# Altium PCB Airbrake Motor Controller.PcbDoc (part 1 of 2)
Units mil, origin at the board's own origin, x right, y up, seen from the top; angles counter-clockwise.
Board outline 2250 x 2250 mil, 4 copper layers (Top Layer, Power Plane, Ground Plane, Bottom Layer), stack 23.756 mil thick; 112 components, 86 nets, 376 pads, 168 vias.
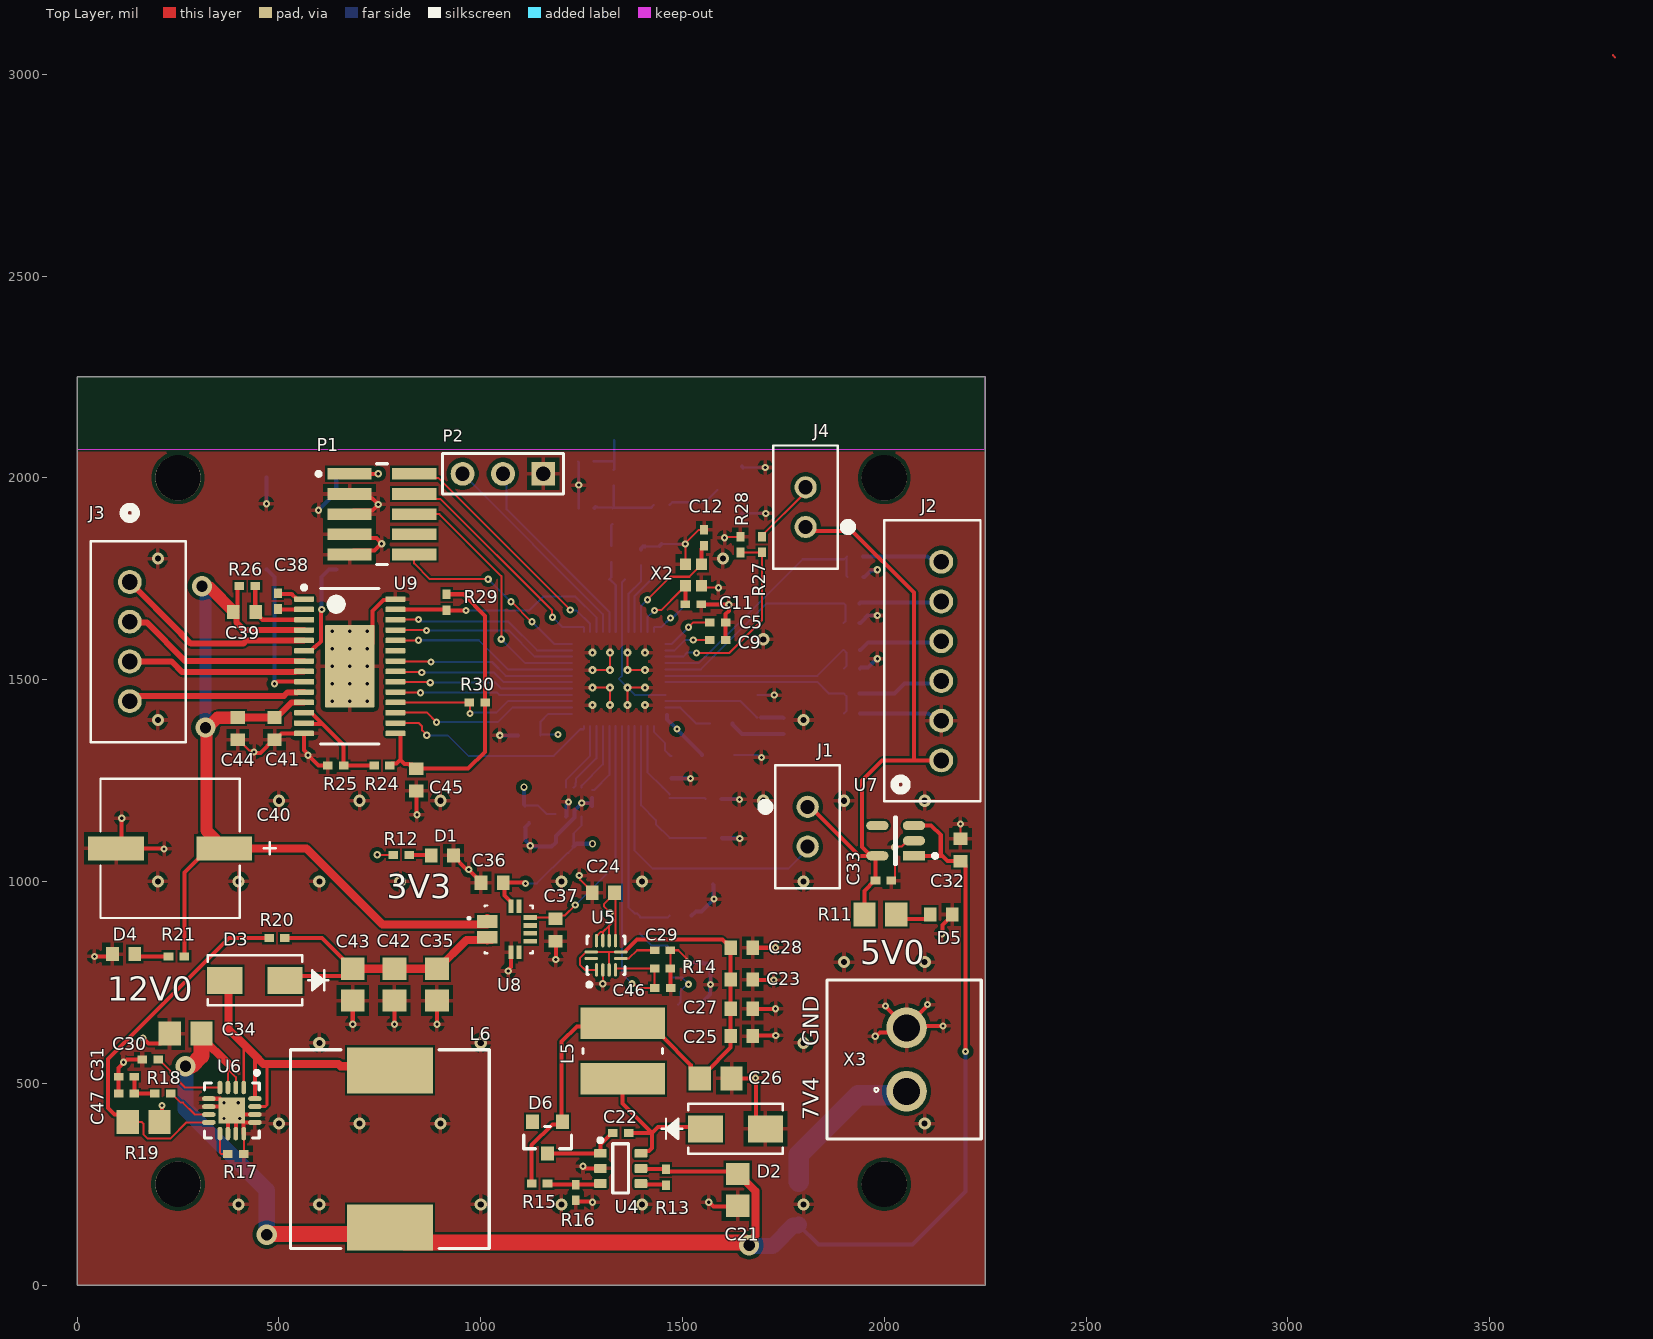
[diagram p0: Top Layer view]
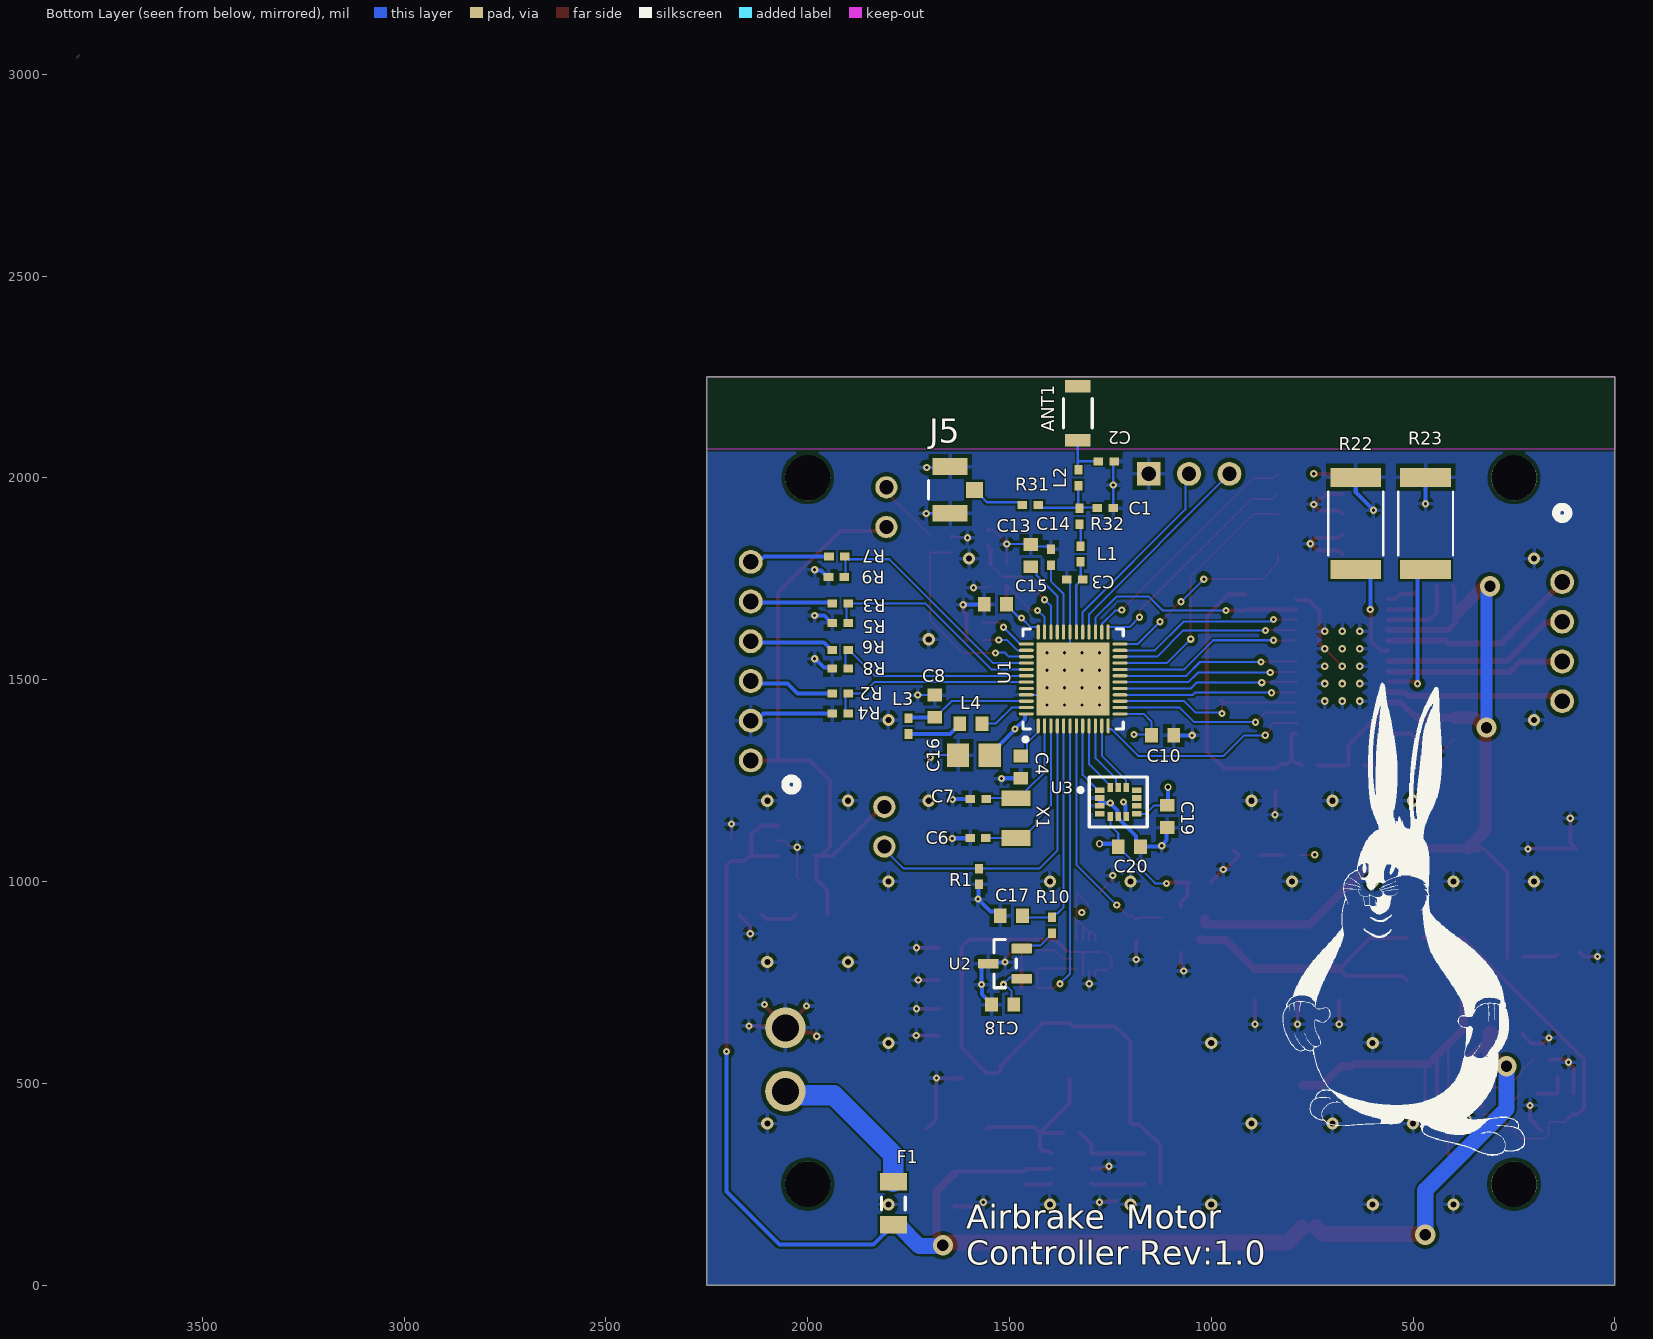
[diagram p1: Bottom Layer view, seen from below]
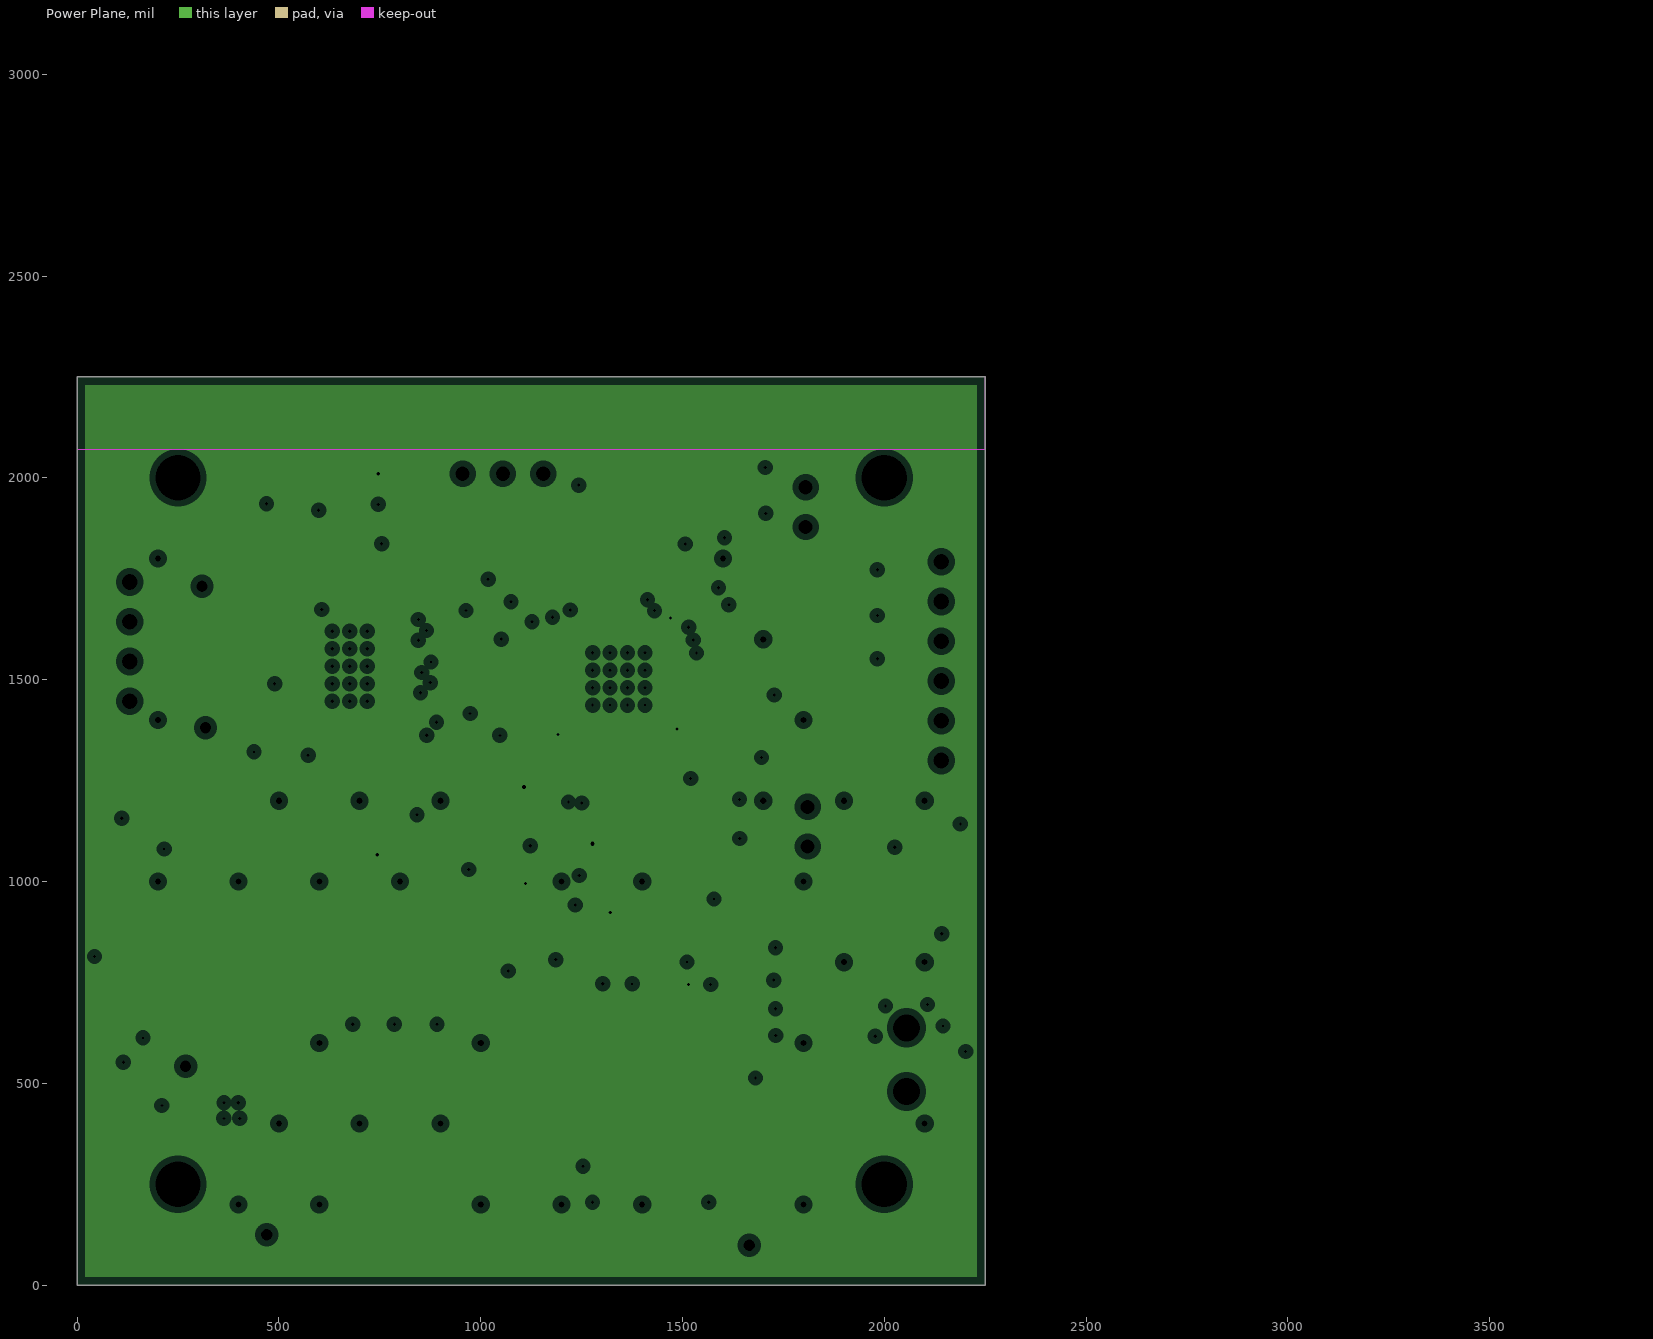
[diagram p2: Power Plane, clearances drawn from the general rule]
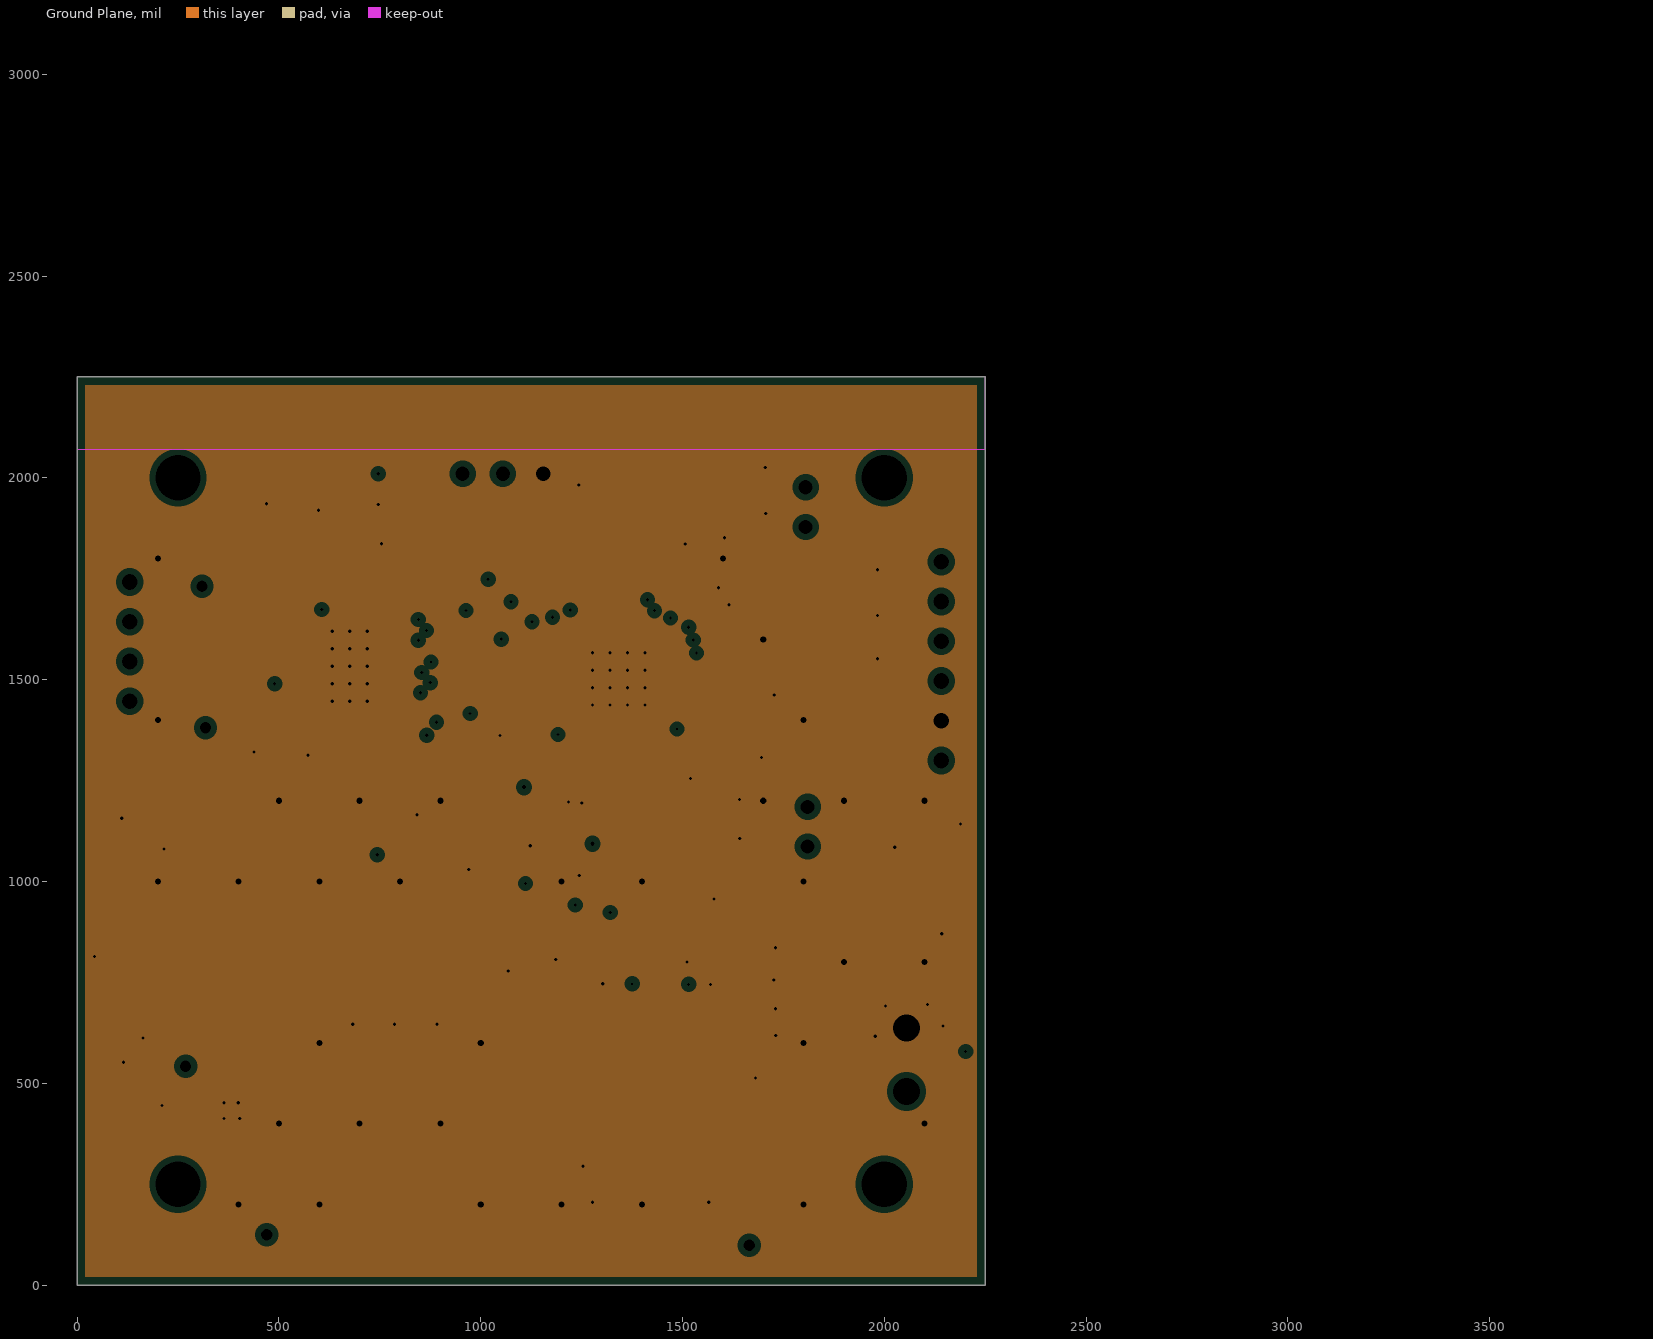
[diagram p3: Ground Plane, clearances drawn from the general rule]

## Layer stack, top to bottom
Top Solder: solder mask 0.4, Solder Resist, Dk 3.5
Top Layer: signal copper 1.4
Dielectric 2: prepreg 2.8, PP-006, Dk 4.1
Power Plane: plane copper 1.378, net 3V3
Dielectric 1: dielectric 12.6, FR-4, Dk 4.8
Ground Plane: plane copper 1.378, net GND
Dielectric 3: prepreg 2.8, PP-006, Dk 4.1
Bottom Layer: signal copper 1.4
Bottom Solder: solder mask 0.4, Solder Resist, Dk 3.5

## Board outline
0,0 2250,0 2250,2250 0,2250

## Design rules (kind name [scope] priority, off if disabled: settings)
Clearance "Stitching GND" [IsStitchingVia and InNet('GND') vs (IsVia and (Not IsStitchingVia)) Or IsPad] p1: gap=5 ignorepadtopadclearanceinfootprint=FALSE
Clearance [All] p2: gap=5 ignorepadtopadclearanceinfootprint=FALSE except(0: Arc-Text Arc-Hole Track-Text Track-Hole SMDPad-Hole THPad-Hole Via-Text Via-Hole Fill-Text Fill-Hole Poly-Text Poly-Hole Region-Text Region-Hole Text-Hole; 6: SMDPad-Text THPad-Text Text-Text; 10: Arc-Via Track-Via SMDPad-Via THPad-Via THPad-Fill THPad-Poly THPad-Region Via-Via Via-Fill Via-Poly Via-Region)
DiffPairsRouting [All] p1: maxlimit=10 minlimit=10 mostfreqgap=10 substack1={1D8CD49F-4EEA-4594-B777-3CBCF2328C12} toplayer_{1d8cd49f-4eea-4594-b777-3cbcf2328c12}_minwidth=15 toplayer_{1d8cd49f-4eea-4594-b777-3cbcf2328c12}_maxwidth=15 toplayer_{1d8cd49f-4eea-4594-b777-3cbcf2328c12}_prefwidth=15 bottomlayer_{1d8cd49f-4eea-4594-b777-3cbcf2328c12}_minwidth=15 bottomlayer_{1d8cd49f-4eea-4594-b777-3cbcf2328c12}_maxwidth=15 bottomlayer_{1d8cd49f-4eea-4594-b777-3cbcf2328c12}_prefwidth=15 substack2={60200B00-BAF0-4EC6-BC13-ED241C6110E6} toplayer_{60200b00-baf0-4ec6-bc13-ed241c6110e6}_minwidth=15 toplayer_{60200b00-baf0-4ec6-bc13-ed241c6110e6}_maxwidth=15 toplayer_{60200b00-baf0-4ec6-bc13-ed241c6110e6}_prefwidth=15 bottomlayer_{60200b00-baf0-4ec6-bc13-ed241c6110e6}_minwidth=15 bottomlayer_{60200b00-baf0-4ec6-bc13-ed241c6110e6}_maxwidth=15 bottomlayer_{60200b00-baf0-4ec6-bc13-ed241c6110e6}_prefwidth=15 substack3={2033A8F8-11FA-4127-81A0-3110334D7064} toplayer_{2033a8f8-11fa-4127-81a0-3110334d7064}_minwidth=15 toplayer_{2033a8f8-11fa-4127-81a0-3110334d7064}_maxwidth=15 toplayer_{2033a8f8-11fa-4127-81a0-3110334d7064}_prefwidth=15 bottomlayer_{2033a8f8-11fa-4127-81a0-3110334d7064}_minwidth=15 bottomlayer_{2033a8f8-11fa-4127-81a0-3110334d7064}_maxwidth=15 bottomlayer_{2033a8f8-11fa-4127-81a0-3110334d7064}_prefwidth=15 substack4={D68601EE-FDA2-4314-95AA-3F224DECC2A0} toplayer_{d68601ee-fda2-4314-95aa-3f224decc2a0}_minwidth=15 toplayer_{d68601ee-fda2-4314-95aa-3f224decc2a0}_maxwidth=15 toplayer_{d68601ee-fda2-4314-95aa-3f224decc2a0}_prefwidth=15 bottomlayer_{d68601ee-fda2-4314-95aa-3f224decc2a0}_minwidth=15 bottomlayer_{d68601ee-fda2-4314-95aa-3f224decc2a0}_maxwidth=15 bottomlayer_{d68601ee-fda2-4314-95aa-3f224decc2a0}_prefwidth=15 substack5={DDA2C391-E1F9-40C6-9444-D76CE48EE4B7} toplayer_{dda2c391-e1f9-40c6-9444-d76ce48ee4b7}_minwidth=15 toplayer_{dda2c391-e1f9-40c6-9444-d76ce48ee4b7}_maxwidth=15 toplayer_{dda2c391-e1f9-40c6-9444-d76ce48ee4b7}_prefwidth=15 bottomlayer_{dda2c391-e1f9-40c6-9444-d76ce48ee4b7}_minwidth=15 bottomlayer_{dda2c391-e1f9-40c6-9444-d76ce48ee4b7}_maxwidth=15 bottomlayer_{dda2c391-e1f9-40c6-9444-d76ce48ee4b7}_prefwidth=15 substack6={67619F17-63B8-4237-8720-1B805477E003} toplayer_{67619f17-63b8-4237-8720-1b805477e003}_minwidth=15 toplayer_{67619f17-63b8-4237-8720-1b805477e003}_maxwidth=15 toplayer_{67619f17-63b8-4237-8720-1b805477e003}_prefwidth=15 bottomlayer_{67619f17-63b8-4237-8720-1b805477e003}_minwidth=15 bottomlayer_{67619f17-63b8-4237-8720-1b805477e003}_maxwidth=15 bottomlayer_{67619f17-63b8-4237-8720-1b805477e003}_prefwidth=15 toplayer_minwidth=15 toplayer_maxwidth=15 toplayer_prefwidth=15 bottomlayer_minwidth=15 bottomlayer_maxwidth=15 bottomlayer_prefwidth=15 substack7={87F45CA6-8762-4F65-A57C-34D04795256B} toplayer_{87f45ca6-8762-4f65-a57c-34d04795256b}_minwidth=15 toplayer_{87f45ca6-8762-4f65-a57c-34d04795256b}_maxwidth=15 toplayer_{87f45ca6-8762-4f65-a57c-34d04795256b}_prefwidth=15 bottomlayer_{87f45ca6-8762-4f65-a57c-34d04795256b}_minwidth=15 bottomlayer_{87f45ca6-8762-4f65-a57c-34d04795256b}_maxwidth=15 bottomlayer_{87f45ca6-8762-4f65-a57c-34d04795256b}_prefwidth=15 substack8={194D61EF-D4DC-468E-B6D5-786B1C598D2A} toplayer_{194d61ef-d4dc-468e-b6d5-786b1c598d2a}_minwidth=15 toplayer_{194d61ef-d4dc-468e-b6d5-786b1c598d2a}_maxwidth=15 toplayer_{194d61ef-d4dc-468e-b6d5-786b1c598d2a}_prefwidth=15 bottomlayer_{194d61ef-d4dc-468e-b6d5-786b1c598d2a}_minwidth=15 bottomlayer_{194d61ef-d4dc-468e-b6d5-786b1c598d2a}_maxwidth=15 bottomlayer_{194d61ef-d4dc-468e-b6d5-786b1c598d2a}_prefwidth=15 substack9={3F41A5DB-CA06-4CF2-BA7A-F14E5AEFF9D4} toplayer_{3f41a5db-ca06-4cf2-ba7a-f14e5aeff9d4}_minwidth=15 toplayer_{3f41a5db-ca06-4cf2-ba7a-f14e5aeff9d4}_maxwidth=15 toplayer_{3f41a5db-ca06-4cf2-ba7a-f14e5aeff9d4}_prefwidth=15 bottomlayer_{3f41a5db-ca06-4cf2-ba7a-f14e5aeff9d4}_minwidth=15 bottomlayer_{3f41a5db-ca06-4cf2-ba7a-f14e5aeff9d4}_maxwidth=15 bottomlayer_{3f41a5db-ca06-4cf2-ba7a-f14e5aeff9d4}_prefwidth=15 substack10={7F9F6F53-2B01-4EE7-9BAC-B8D45DA15D97} toplayer_{7f9f6f53-2b01-4ee7-9bac-b8d45da15d97}_minwidth=15 toplayer_{7f9f6f53-2b01-4ee7-9bac-b8d45da15d97}_maxwidth=15 toplayer_{7f9f6f53-2b01-4ee7-9bac-b8d45da15d97}_prefwidth=15 bottomlayer_{7f9f6f53-2b01-4ee7-9bac-b8d45da15d97}_minwidth=15 bottomlayer_{7f9f6f53-2b01-4ee7-9bac-b8d45da15d97}_maxwidth=15 bottomlayer_{7f9f6f53-2b01-4ee7-9bac-b8d45da15d97}_prefwidth=15 substack11={9D6A6761-42E1-4263-9333-28A519B7A445} toplayer_{9d6a6761-42e1-4263-9333-28a519b7a445}_minwidth=15 toplayer_{9d6a6761-42e1-4263-9333-28a519b7a445}_maxwidth=15 toplayer_{9d6a6761-42e1-4263-9333-28a519b7a445}_prefwidth=15 bottomlayer_{9d6a6761-42e1-4263-9333-28a519b7a445}_minwidth=15 bottomlayer_{9d6a6761-42e1-4263-9333-28a519b7a445}_maxwidth=15 bottomlayer_{9d6a6761-42e1-4263-9333-28a519b7a445}_prefwidth=15 maxuncoupledlength=500
HoleSize [All] p1: absolutevalues=TRUE maxlimit=200 minlimit=1 maxpercent=80.000 minpercent=20.000
PlaneClearance [All] p1: clearance=15
PlaneConnect [All] p1: planeconnectstyle=Direct reliefexpansion=20 reliefentries=4 reliefconductorwidth=10 reliefairgap=10
PolygonConnect [All] p1: connectstyle=Relief reliefconductorwidth=10 reliefentries=4 polygonreliefangle="90 Angle" airgapwidth=10
RoutingVias [All] p1: holewidth=28 width=50 viastyle="Through Hole" minholewidth=28 minwidth=50 maxholewidth=28 maxwidth=50
SolderMaskExpansion SolderMaskExpansion_1 [IsVia] p1: expansion=4 istentingtop=TRUE
SolderMaskExpansion [All] p2: expansion=2 istentingtop=FALSE
Width [All] p1: maxlimit=50 minlimit=5 preferedwidth=10 substack1={1D8CD49F-4EEA-4594-B777-3CBCF2328C12} substack2={60200B00-BAF0-4EC6-BC13-ED241C6110E6} substack3={2033A8F8-11FA-4127-81A0-3110334D7064} substack4={D68601EE-FDA2-4314-95AA-3F224DECC2A0} substack5={DDA2C391-E1F9-40C6-9444-D76CE48EE4B7} substack6={67619F17-63B8-4237-8720-1B805477E003} substack7={87F45CA6-8762-4F65-A57C-34D04795256B} substack8={194D61EF-D4DC-468E-B6D5-786B1C598D2A} substack9={3F41A5DB-CA06-4CF2-BA7A-F14E5AEFF9D4} substack10={7F9F6F53-2B01-4EE7-9BAC-B8D45DA15D97} substack11={9D6A6761-42E1-4263-9333-28A519B7A445} minimp=50.000000 maximp=50.000000 favimp=50.000000
26 further rules are at their usual default settings.

## Classes and differential pairs
component class Designator: C17 C18 R10 U2

## Components (designator, comment, footprint, x,y, rotation, side; value= is the part's Value field where it differs from the comment)
ANT1 "AMCA31-2R450G-S1F-T3" FP-AMCA31-MFG 1330.43,2160 r90 bottom
C1 "Cap" 0402-A 1262.31,1924.97 r0 bottom value=1.5pF
C2 "Cap" 0402-A 1260.35,2041.01 r0 bottom value=NC
C3 "Cap" 0402-A 1338.23,1748.32 r180 bottom value=0.8pF
C4 "Cap" 1608[0603] 1472.17,1283.25 r90 bottom value=100nF
C5 "Cap" 0402-A 1587.05,1641.76 r0 top value=12pF
C6 "Cap" 0402-A 1578.02,1107.78 r180 bottom value=12pF
C7 "Cap" 0402-A 1577.09,1204.75 r180 bottom value=12pF
C8 "Cap" 1608[0603] 1685.43,1434.35 r270 bottom value=1uF
C9 "Cap" 0402-A 1587.05,1598.37 r0 top value=12pF
C10 "Cap" 1608[0603] 1120.43,1361.91 r180 bottom value=100nF
C11 "Cap" 0402-A 1526.85,1686.76 r180 top value=12pF
C12 "Cap" 0402-A 1553.42,1851.51 r270 top value=12pF
C13 "Cap" 1608[0603] 1446.93,1807.14 r90 bottom value=100nF
C14 "Cap" 0402-A 1397.28,1803.41 r90 bottom value=NC
C15 "Cap" 1608[0603] 1534.72,1686.76 r0 bottom value=100nF
C16 "Cap" 6-0805_M 1587.91,1312.78 r0 bottom value=4.7uF
C17 "Cap" 1608[0603] 1495.17,915.12 r0 bottom value=680pF
C18 "Cap" 1608[0603] 1516.89,695 r0 bottom value=100nF
C19 "Cap" 1608[0603] 1109.12,1160.99 r90 bottom value=100nF
C20 "Cap" 1608[0603] 1202.87,1086.19 r0 bottom value=100nF
C21 "Cap" 6-0805_M 1636.66,235.73 r90 top value=10uF
C22 "Cap" 0402-A 1346.65,376.91 r180 top value=10nF
C23 "Cap" 1608[0603] 1646.73,756.91 r0 top value=100nF
C24 "Cap" 1608[0603] 1303.76,971.91 r180 top value=100nF
C25 "Cap" 1608[0603] 1646.73,616.91 r180 top value=1uF
C26 "Cap" 6-0805_M 1582.24,511.91 r180 top value=10uF
C27 "Cap" 1608[0603] 1646.73,684.35 r180 top value=100nF
C28 "Cap" 1608[0603] 1646.73,835.77 r180 top value=100nF
C29 "Cap" 0402-A 1450.43,829.52 r180 top value=6.8nF
C30 "Cap" 0402-A 181.49,558.52 r180 top value=47nF
C31 "Cap" 0402-A 122.35,516.05 r180 top value=150nF
C32 "Cap" 1608[0603] 2188.46,1077.96 r270 top value=1uF
C33 "Cap" 0402-A 1997.8,1001.91 r180 top value=2.2uF
C34 "Cap" 6-0805_M 268.66,622.98 r180 top value=4.7uF
C35 "Cap" 6-0805_M 891.53,744.31 r270 top value=10uF
C36 "Cap" 1608[0603] 1027.99,996.91 r180 top value=100nF
C37 "Cap" 1608[0603] 1185.28,879.71 r270 top value=100nF
C38 "Cap" 0402-A 497.27,1694.7 r270 top value=12pF
C39 "Cap" 1608[0603] 414.7,1667.7 r0 top value=100nF
C40 "Cap2" PCAP_8x10-ELECT_NCA 230.43,1081.91 r180 top value=100uF
C41 "Cap" 1608[0603] 489.1,1378.85 r90 top value=100nF
C42 "Cap" 6-0805_M 786.05,744.31 r270 top value=10uF
C43 "Cap" 6-0805_M 682.87,744.31 r270 top value=10uF
C44 "Cap" 1608[0603] 397.93,1378.85 r90 top value=100nF
C45 "Cap" 1608[0603] 840.43,1251.91 r90 top value=470nF
C46 "Cap" 0402-A 1451.3,736.4 r180 top value=470pF
C47 "Cap" 0402-A 122.35,474.47 r180 top value=15nF
D1 "LED0" 1608[0603] 904.98,1064.52 r0 top
D2 "CDBA5150-HF" CDBA5 1630.93,386.91 r0 top
D3 "CDBA5150-HF" CDBA5 440.3,754.86 r180 top
D4 "LED0" 1608[0603] 115,820 r180 top
D5 "LED0" 1608[0603] 2140.98,918.13 r0 top
D6 "BAT54-7-F" FP-SOT23-MFG 1165.43,365.1 r270 top value=10pF
F1 "Fuse 1" C1206 1787.76,202.44 r90 bottom
J1 "B2B-EH-A (LF)(SN)" "CONN_B2B-EH-A (LF)(SN)_JST" 1810,1184.91 r270 top
J2 "Encoder Connector" CONN_B6B-XH-A(LF)(SN)_JST 2140.98,1299.87 r90 top
J3 "B4B-XH-A (LF)(SN)" "CONN_B4B-XH-A (LF)(SN)_JST" 130.43,1741.91 r270 top
J4 "B2B-EH-A (LF)(SN)" "CONN_B2B-EH-A (LF)(SN)_JST" 1805,1878.21 r90 top
J5 "U.FL-R-SMT-1(10)" FP-U_FL-R-SMT-1_10-MFG 1646.83,1970 r270 bottom
L1 "Inductor" 0402-A 1323.56,1811.28 r90 bottom value=3.9nH
L2 "Inductor" 0402-A 1329.47,2000.29 r90 bottom value=3.9nH
L3 "Inductor" 0402-A 1750,1385 r270 bottom value=15nH
L4 "Inductor" 1608[0603] 1595.79,1391.01 r180 bottom value=10uH
L5 "4.7uH" WE-TPC-4818-M 1351.65,580 r90 top
L6 "10uH" WE-PD-L 775,336.99 r90 top
P1 "SWD" SMTC-FTSH-105-01-L-DV-K_V 755,1910 r270 top
P2 "Header 3" HDR1X3 1155,2010 r180 top
R1 "Res1" 0402-A 1575.43,1012.23 r270 bottom value=1k
R2 "Res1" 0402-A 1918.85,1465.75 r0 bottom value=5k
R3 "Res1" 0402-A 1918.85,1688.94 r0 bottom value=5k
R4 "Res1" 0402-A 1919.48,1416.1 r0 bottom value=10k
R5 "Res1" 0402-A 1918.85,1640.59 r0 bottom value=10k
R6 "Res1" 0402-A 1919.48,1573.62 r0 bottom value=5k
R7 "Res1" 0402-A 1927.4,1805.67 r0 bottom value=5k
R8 "Res1" 0402-A 1919.48,1527.32 r0 bottom value=10k
R9 "Res1" 0402-A 1928.69,1753.94 r0 bottom value=10k
R10 "Res1" 0402-A 1395,891.52 r90 bottom value=0
R11 "Res1" 6-0805_M 1989.93,918.13 r180 top value=470
R12 "Res1" 0402-A 802.63,1065.89 r0 top value=150
R13 "Res1" 0402-A 1458.86,267.23 r90 top value=10k
R14 "Res1" 0402-A 1450.43,784.66 r180 top value=150k
R15 "Res1" 0402-A 1145.75,251.48 r0 top value=16.5k
R16 "Res1" 0402-A 1235.43,229.3 r90 top value=10k
R17 "Res1" 0402-A 393.19,325 r0 top value=78.7k
R18 "Res1" 0402-A 212.51,474.47 r180 top value=1.6k
R19 "Res1" 6-0805_M 164.68,403.69 r0 top value=1.14k
R20 "Res1" 0402-A 495.12,859.41 r180 top value=10k
R21 "Res1" 0402-A 246.02,814.09 r0 top value=1k
R22 "Res1" RC2512N_PAN 641.97,1886.91 r270 bottom value=220m
R23 "Res1" RC2512N_PAN 469.05,1886.91 r270 bottom value=220m
R24 "Res1" 0402-A 755.43,1286.91 r0 top value=10k
R25 "Res1" 0402-A 640.43,1286.91 r180 top value=10k
R26 "Res1" 0402-A 421.62,1731.53 r0 top value=1M
R27 "Res1" 0402-A 1696.57,1834.91 r270 top value=5k
R28 "Res1" 0402-A 1643.42,1834.7 r90 top value=10k
R29 "Res1" 0402-A 915.43,1691.91 r270 top value=10k
R30 "Res1" 0402-A 991.31,1443.69 r180 top value=10k
R31 "Res1" 0402-A 1448.18,1932.6 r0 bottom value=0
R32 "Res1" 0402-A 1326.42,1905.29 r90 bottom value=0
U1 "NRF52832-QFAA-R" NRSC-QF-48_M 1342.16,1501.76 r90 bottom
U2 "TMP235AQDBZTQ1" FP-DBZ0003A-MFG 1510.92,796.48 r0 bottom
U3 "LSM6DSMTR" FP-LGA-14L-DM00249496-MFG 1230.43,1196.91 r180 bottom
U4 "LM2736XMK/NOPB" DDC0006A_L 1346.65,288.88 r0 top
U5 "MP5087GG" MP5087GG-Z 1310.31,817.07 r90 top
U6 "TPS55340QRTERQ1" TPS55340QRTERQ1 383.35,432.39 r270 top
U7 "AP2204K-5.0TRG1" FP-SOT25-IPC_B 2028.02,1100.93 r180 top
U8 "ACS70331EESATR-005U3" ALLEGRO_ACS70331EESATR-005U3 1069.33,881.34 r0 top
U9 "DRV8825PWP" PWP0028C_L 675.43,1533.25 r0 top
X1 "FC-135 32.7680KA-AC" FC-13532.7680KA-AC 1483.7,1156.99 r270 bottom
X2 "XRCGB32M000F1H00R0" XRCGB32M000F1H00R0 1526.85,1759.27 r270 top
X3 "Battery Connector" B2P-VH 2055,558.74 r90 top

## Footprints (in the part's own frame and the unit in brackets; to place one, negate y for a bottom-side part, rotate by r counter-clockwise, add the part's x,y. Pads: shape width x height; smd on the part's side, far side on the other; paste and mask are expansions set on the pad)
6-0805_M [mm] "Chip Resistor, Body 2.0x1.2mm, IPC Low Density"
  rect 1.4x1.5 smd: 1(-1,0) 2(1,0)
  body extent -1.07,-0.7 1.07,0.7, height 0.7
0402-A [mm] "Chip Inductor, Body 1.0x0.5mm, IPC High Density"
  rect 0.6x0.5 smd: 1(-0.5,0) 2(0.5,0)
  body extent -0.55,-0.3 0.55,0.3, height 0.55
1608[0603] [mm] "Chip Capacitor, Body 1.6x0.8mm, IPC High Density"
  rect 0.8x0.9 smd: 1(-0.7,0) 2(0.7,0)
  body extent -0.87,-0.48 0.87,0.48, height 1.3
ALLEGRO_ACS70331EESATR-005U3 [mm]
  rect 1.3x0.4 smd: 1(-1.35,0.7) 2(-1.35,0.3) 3(-1.35,-0.3) 4(-1.35,-0.7)
  rect 0.3x0.85 smd: 5(0.15,-1.45) 6(0.65,-1.45) 11(0.65,1.45) 12(0.15,1.45)
  rect 0.85x0.3 smd: 7(1.35,-0.75) 8(1.35,-0.25) 9(1.35,0.25) 10(1.35,0.75)
  silkscreen extent -2.57,-1.5 1.5,1.5
B2P-VH [mm]
  round 2.55 hole 1.7: 1(-2,0) 2(2,0)
  silkscreen extent -5,-4.7 5,5
C1206 [mm] "Chip Capacitor, Body 3.2x1.6mm, IPC High Density"
  rect 1.1x1.7 smd: 1(-1.35,0) 2(1.35,0)
  silkscreen extent -0.4,-0.75 0.4,0.75, body extent -1.7,-0.9 1.7,0.9, height 1.3
CDBA5 [mil]
  rect 87x67 smd paste+0 mask+0: 1(-74.5,0) 2(74.5,0)
  silkscreen extent -182,-62 117,62, body extent 0,0 10,10, height 10
"CONN_B2B-EH-A (LF)(SN)_JST" [mil]
  round 55 hole 35 mask+0: 1(0,0) 2(98.43,0)
  silkscreen extent -103,-115 202,80, body extent 0,0 10,10, height 10
"CONN_B4B-XH-A (LF)(SN)_JST" [mil]
  round 59 hole 39 mask+0: 1(0,0) 2(98.43,0) 3(196.86,0) 4(295.29,0)
  silkscreen extent -186,-97 397,139, body extent 0,0 10,10, height 10
CONN_B6B-XH-A(LF)(SN)_JST [mil]
  round 59 hole 39 mask+0: 1(0,0) 2(98.43,0) 3(196.85,0) 4(295.28,0) 5(393.7,0) 6(492.13,0)
  silkscreen extent -101,-97 596,141, body extent 0,0 10,10, height 10
DDC0006A_L [mm] "SOT23, 6-Leads, Body 3.05x1.75mm, Pitch 0.95mm, IPC High Density"
  rrect18% 0.8x0.55 smd: 1(-1.275,0.95) 2(-1.275,0) 3(-1.275,-0.95) 4(1.275,-0.95) 5(1.275,0) 6(1.275,0.95)
  silkscreen extent -1.4,-1.55 0.5,1.9, body extent -1.43,-1.48 1.43,1.49, height 0.9
FC-13532.7680KA-AC [mm]
  rect 1x1.8 smd: 1(-1.25,0) 2(1.25,0)
FP-AMCA31-MFG [mm]
  rect 0.8x1.6 smd paste+0 mask+0: 1(-1.7,0) 2(1.7,0)
  silkscreen extent -0.92,-0.9 0.92,0.9, body extent -1.62,-0.8 1.58,0.8, height 1.4
FP-DBZ0003A-MFG [mm]
  rrect17% 1.3x0.6 smd paste+0 mask+0: 1(-1.05,0.95) 2(-1.05,-0.95) 3(1.05,0)
  silkscreen extent -0.7,-1.52 0.7,1.52, body extent -1.18,-1.46 1.18,1.46, height 1.12
FP-LGA-14L-DM00249496-MFG [mm]
  rect 0.575x0.35 smd paste+0 mask+0: 1(-1.162,0.75) 2(-1.162,0.25) 3(-1.162,-0.25) 4(-1.162,-0.75) 8(1.162,-0.75) 9(1.162,-0.25) 10(1.162,0.25) 11(1.162,0.75)
  rect 0.35x0.575 smd paste+0 mask+0: 5(-0.5,-0.913) 6(0,-0.913) 7(0.5,-0.913) 12(0.5,0.913) 13(0,0.913) 14(-0.5,0.913)
  silkscreen extent -2.5,-1.58 1.83,1.58, body extent -1.5,-1.25 1.5,1.25, height 0.86
FP-SOT23-MFG [mm]
  rect 0.9x0.8 smd paste+0 mask+0: 1(-1,0.95) 2(-1,-0.95) 3(1,0)
  silkscreen extent -0.7,-1.5 0.7,1.5, body extent -1.55,-1.6 1.55,1.6, height 0.25
FP-SOT25-IPC_B [mm]
  rect 1.407x0.576 smd paste+0 mask+0: 1(-1.151,0.95)
  rrect100% 1.407x0.576 smd paste+0 mask+0: 2(-1.151,0) 3(-1.151,-0.95) 4(1.151,-0.95) 5(1.151,0.95)
  silkscreen extent -2.6,-1.5 0.05,1.5, body extent -2.1,-1.75 2.1,1.75, height 0.25
FP-U_FL-R-SMT-1_10-MFG [mm]
  rect 1x1.05 smd paste-1000 mask+0: 1(0,1.525)
  rect 1.05x2.2 smd paste-1000 mask+0: 2(-1.475,0) 3(1.475,0)
  silkscreen extent -0.58,-1.38 0.58,-1.38, body extent -1.5,-1.55 1.5,1.55, height 1.45
HDR1X3 [mm] "Connector; Header; 3 Position"
  rect 1.5x1.5 hole 0.9: 1(0,0)
  round 1.5 hole 0.9: 2(2.54,0) 3(5.08,0)
  silkscreen extent -1.27,-1.27 6.35,1.27
MP5087GG-Z [mm] "Power Switch/Driver 1:1 P-Channel 7A"
  oval 0.85x0.2 smd: 1(-0.925,0.6) 2(-0.925,0.2) 3(-0.925,-0.2) 4(-0.925,-0.6) 7(0.925,-0.6) 8(0.925,-0.2) 9(0.925,0.2) 10(0.925,0.6)
  oval 0.2x0.85 smd: 5(-0.2,-0.925) 6(0.2,-0.925) 11(0.2,0.925) 12(-0.2,0.925)
  silkscreen extent -1.97,-1.2 1.2,1.2, body extent -1.1,-1.1 1.1,1.1, height 1
NRSC-QF-48_M [mm] "QFN, 48-Leads, Body 6.00x6.00mm, Pitch 0.40mm, Thermal Pad 4.60x4.60mm, IPC Low Density"
  oval 0.95x0.2 smd: 1(-2.95,2.2) 2(-2.95,1.8) 3(-2.95,1.4) 4(-2.95,1) 5(-2.95,0.6) 6(-2.95,0.2) 7(-2.95,-0.2) 8(-2.95,-0.6) 9(-2.95,-1) 10(-2.95,-1.4) 11(-2.95,-1.8) 12(-2.95,-2.2) 25(2.95,-2.2) 26(2.95,-1.8) 27(2.95,-1.4) 28(2.95,-1) 29(2.95,-0.6) 30(2.95,-0.2) 31(2.95,0.2) 32(2.95,0.6) 33(2.95,1) 34(2.95,1.4) 35(2.95,1.8) 36(2.95,2.2)
  oval 0.2x0.95 smd: 13(-2.2,-2.95) 14(-1.8,-2.95) 15(-1.4,-2.95) 16(-1,-2.95) 17(-0.6,-2.95) 18(-0.2,-2.95) 19(0.2,-2.95) 20(0.6,-2.95) 21(1,-2.95) 22(1.4,-2.95) 23(1.8,-2.95) 24(2.2,-2.95) 37(2.2,2.95) 38(1.8,2.95) 39(1.4,2.95) 40(1,2.95) 41(0.6,2.95) 42(0.2,2.95) 43(-0.2,2.95) 44(-0.6,2.95) 45(-1,2.95) 46(-1.4,2.95) 47(-1.8,2.95) 48(-2.2,2.95)
  rect 4.6x4.6 smd: 49(0,0)
  silkscreen extent -3.92,-3.15 3.15,3.15, body extent -3,-3 3,3, height 0.9
PCAP_8x10-ELECT_NCA [mil]
  rect 138x59 smd paste+0 mask+0: 1(-134,0) 2(134,0)
  silkscreen extent -262,-173 173,173, body extent 0,0 10,10, height 10
PWP0028C_L [mm] "SOP, 28-Leads, Body 9.8x4.5mm, Pitch 0.65mm, Thermal Pad 5.18x3.1mm, IPC High Density"
  rrect29% 1.25x0.35 smd: 1(-2.875,4.225) 2(-2.875,3.575) 3(-2.875,2.925) 4(-2.875,2.275) 5(-2.875,1.625) 6(-2.875,0.975) 7(-2.875,0.325) 8(-2.875,-0.325) 9(-2.875,-0.975) 10(-2.875,-1.625) 11(-2.875,-2.275) 12(-2.875,-2.925) 13(-2.875,-3.575) 14(-2.875,-4.225) 15(2.875,-4.225) 16(2.875,-3.575) 17(2.875,-2.925) 18(2.875,-2.275) 19(2.875,-1.625) 20(2.875,-0.975) 21(2.875,-0.325) 22(2.875,0.325) 23(2.875,0.975) 24(2.875,1.625) 25(2.875,2.275) 26(2.875,2.925) 27(2.875,3.575) 28(2.875,4.225)
  rrect3% 3.1x5.18 smd: 29(0,0)
  silkscreen extent -3,-4.9 1.85,5.07, body extent -2.25,-4.9 2.25,4.9, height 1.2
RC2512N_PAN [mm]
  rect 1.206x3.2 smd paste+0 mask+0: 1(-2.903,0) 2(2.903,0)
  silkscreen extent -1.99,-1.73 1.99,1.73, body extent 0,0 0.25,0.25, height 0.25
SMTC-FTSH-105-01-L-DV-K_V [mm] "CONN, 10-Leads, Body 6.35x3.43mm, Pitch 1.27mm"
  rect 0.74x2.79 smd: 1(-2.54,-2.035) 2(-2.54,2.035) 3(-1.27,-2.035) 4(-1.27,2.035) 5(0,-2.035) 6(0,2.035) 7(1.27,-2.035) 8(1.27,2.035) 9(2.54,-2.035) 10(2.54,2.035)
  silkscreen extent -3.17,-4.1 3.17,0.34, body extent -3.17,-2.92 3.18,2.92, height 6.12
TPS55340QRTERQ1 [mm] "Boost Switching Regulator IC Positive, Isolation Capable Adjustable 2.9V 1 Output 5.25A (Switch) 16-WFQFN Exposed Pad"
  oval 0.85x0.3 smd: 1(-1.45,0.75) 2(-1.45,0.25) 3(-1.45,-0.25) 4(-1.45,-0.75) 9(1.45,-0.75) 10(1.45,-0.25) 11(1.45,0.25) 12(1.45,0.75)
  oval 0.3x0.85 smd: 5(-0.75,-1.45) 6(-0.25,-1.45) 7(0.25,-1.45) 8(0.75,-1.45) 13(0.75,1.45) 14(0.25,1.45) 15(-0.25,1.45) 16(-0.75,1.45)
  rect 1.66x1.66 smd: 17(0,0)
  silkscreen extent -2.5,-1.73 1.73,1.73, body extent -1.66,-1.66 1.66,1.66, height 0.8
WE-PD-L [mm] "SMD Inductor, 2-Leads, Body 12.0 x 12.0 mm"
  rect 2.9x5.4 smd: 1(-4.95,0) 2(4.95,0)
  silkscreen extent -6.25,-6.25 6.25,6.25, body extent -6,-6 6,6, height 5.98
WE-TPC-4818-M [mm] "SMD Inductor, 2-Leads, Body 4.8 x 4.8 mm"
  rect 2x5.3 smd: 1(-1.75,0) 2(1.75,0)
  silkscreen extent -0.15,-2.5 0.15,2.5, body extent -2.4,-2.4 2.4,2.4, height 1.79
XRCGB32M000F1H00R0 [mm]
  rect 0.75x0.7 smd: 1(-0.675,0.5) 2(0.675,0.5) 3(0.675,-0.5) 4(-0.675,-0.5)
  body extent -1,-0.8 1,0.8, height 0.65

## Part data
ANT1: library part CMP-27836-000002-1, "RF ANT 2.4GHZ CHIP SOLDER SMD", Manufacturer=Abracon, Max Frequency=2450MHz, Package=AMCA31, Power Rating=3W, Temperature="-40°C to +85°C", Temperature Range High=+85°C, Temperature Range Low=-40°C, Automotive=No, Bandwidth=100MHz, Category=Ant, ComponentLink2Description=Datasheet, ComponentLink2URL=https://abracon.com/chip-antenna/AMCA31-2R450G-S1F-T3.pdf, Device Class L1="Integrated Circuits (ICs)", Device Class L2="RF Semiconductors and Devices", Device Class L3="RF Antennas", Digikey Description="RF ANT 2.4GHZ CHIP SOLDER SMD", Height=1.4mm, Impedance=50Ω, Lead Free=Yes, Manufacturer Part Number=AMCA31-2R450G-S1F-T3, Mouser Description="Antennas 2.45GHz BW 90dB + Gain -1 dBi avg.", Number Of Bands=1, Octopart=https://octopart.com/amca31-2r450g-s1f-t3-abracon-31435383, RoHS=TRUE
C1 C2 C3 C4 C5 C6 C7 C8 C9 C10 C11 C12 C13 C14 C15 C16 C17 C18 C19 C20 C21 C22 C23 C24 C25 C26 C27 C28 C29 C30 C31 C32 C33 C34 C35 C36 C37 C38 C39 C40 C41 C42 C43 C44 C45 C46 C47: "Capacitor", Publisher="Altium Limited"
  C1 C2 C3 C4 C5 C6 C7 C8 C9 C10 C11 C12 C13 C14 C15 C16 C17 C18 C19 C20 C21 C22 C23 C24 C25 C26 C27 C28 C29 C30 C31 C32 C33 C34 C35 C36 C37 C38 C39 C41 C42 C43 C44 C45 C46 C47: LatestRevisionDate=17-Jul-2002, LatestRevisionNote="Re-released for DXP Platform.", PackageDescription="Radial Cap, Thru-Hole; 2 Leads; 0.3 in Pin Spacing", PackageReference=RAD-0.3, Published=8-Jun-2000
  C40: PackageDescription="Capacitor; 2 Leads", PackageReference=CAPR5-4X5, Published=23-Sep-2002
D2 D3 J1 J3 J4: "No Description Available", Copyright="Copyright (C) 2018 Accelerated Designs. All rights reserved", RefDes=RefDes, Type=DEV
  D2 D3: Built_By=EMA_UL_Team, Manufacturer_Part_Number=CDBA5150-HF, SourceLibrary=ComchipTechnology_2015-04-20, Vendor=Comchip
  J1 J4: Built_By=EMA_TJ, Manufacturer_Part_Number="B2B-EH-A (LF)(SN)", SourceLibrary=JST_2019-01-31, Vendor=JST
  J3: Built_By=EMA_Cory, Datasheet=http://www.jst-mfg.com/product/pdf/eng/eXH.pdf, Manufacturer_Part_Number="B4B-XH-A (LF)(SN)", SourceLibrary=JST_2020-02-03, Vendor=JST
D6: library part CMP-0303-00002-2, "DIODE SCHOTTKY 30V 200MA SOT23-3", Capacitance=10pF, Forward Current=200mA, Manufacturer="Diodes Inc.", Max Junction Temp=+150°C, Max Repetitive Reverse Voltage=30V, Max Surge Forward Current=600mA, Package=SOT23, Peak Reverse Current=2uA, Temperature="-65°C to +150°C", Temperature Range Low=-65°C, Automotive=No, Automotive Grade=NA, Category=Diode, ComponentLink2Description=Datasheet, ComponentLink2URL=https://www.diodes.com/assets/Datasheets/ds11005.pdf, Device Class L1="Discrete Semiconductors", Device Class L2=Diodes, Device Class L3="Schottky Diodes", Digikey Description="DIODE SCHOTTKY 30V 200MA SOT23-3", Footprint Url=https://www.diodes.com/assets/Package-Files/SOT23.pdf, Height=1.1mm, Lead Free=Yes, Manufacturer Part Number=BAT54-7-F, Mouser Description="Switching diode SOT-23 30 V 200 mA", Octopart=https://octopart.com/bat54-7-f-diodes+inc.-39681803, Reverse Voltage=30V, RoHS=TRUE, Standoff Height=0.013mm, Temperature Range High=+150°C
F1: "Fuse", LatestRevisionDate=17-Jul-2002, LatestRevisionNote="Re-released for DXP Platform.", PackageDescription="Thru-Hole; 2 Leads", PackageReference=PIN-W2/E2.8, Published=8-Jun-2000, Publisher="Altium Limited"
J2: library part B6B-XH-A(LF)(SN), "No Description Available", Built_By=EMA_Cory, Copyright="Copyright (C) 2018 Accelerated Designs. All rights reserved", Manufacturer_Part_Number=B6B-XH-A(LF)(SN), RefDes=RefDes, SourceLibrary=JST_2019-12-02, Type=DEV, Vendor=JST
J5: library part CMP-2000-05152-2, "CONN U.FL RCPT STR 50 OHM SMD", Dielectric Material=Polymer, Frequency=6GHz, Housing Color=Beige, Insulation Resistance=500MR, Max Operating Temperature=90°C, Min Operating Temperature=-40°C, Package Quantity=2500, Body Material=Bronze, Body Plating=Silver, Connector Type=Coaxial, Contact Material=Brass, Contact Plating=Gold, Depth=3.1mm, Fastening Type=Snap, Gender=Male, Impedance=50R, Lead Free="Lead Free", Length=3mm, Max Frequency=6GHz, Mount="Surface Mount", Orientation=Straight, Packaging="Tape and Reel", Radiation Hardening=No, REACH SVHC="No SVHC", Termination=Solder, Wire/Cable Type=Coaxial
L5: library part CMP-0227-00330-1, "SMD Shielded Tiny Power Inductor WE-TPC, L = 4.70 µH", Inductance="4.70 ÂµH", ComponentLink1Description="Manufacturer Link", ComponentLink1URL=http://www.we-online.com, ComponentLink2Description=Datasheet, ComponentLink2URL=http://www.we-online.de/katalog/media/pdf/744042004.pdf, DatasheetVersion="ver 6, Aug-2010", PackageDescription="SMD Inductor, 2-Leads, Body 4.8 x 4.8 mm", PackageReference=WE-TPC-4818-M, PackageVersion=2010
L6: library part CMP-0227-00708-1, "SMD-Shielded Power Inductor WE-PD, L = 10.0 µH", Inductance="10.0 ÂµH", ComponentLink1Description="Manufacturer Link", ComponentLink1URL=http://www.we-online.com, ComponentLink2Description=Datasheet, ComponentLink2URL=http://www.we-online.de/katalog/media/pdf/74477110.pdf, DatasheetVersion="ver 7, Sep-2006", PackageDescription="SMD Inductor, 2-Leads, Body 12.0 x 12.0 mm", PackageReference=WE-PD-L, PackageVersion=2006
P1: library part CMP-2000-05353-1, "Male Header, Pitch 1.27 mm, 2 x 5 Position, Height 6.25 mm", Color=Black, Manufacturer=Samtec, Package Description="Male Header, Pitch 1.27 mm, 2 x 5 Position, Height 5.97 mm, Tail Length 4.32 mm", Package Reference=FTSH-105-01-L-DV-K, Standard Package=1, Category=Connectors,Interconnects, Connector Type=Header,Unshrouded, Contact Finish=Gold, Contact Finish Thickness=10µin(0.25µm), Contact Mating Length="0.120\"(3.05mm)", Contact Type=MalePin, Datasheet URL=http://suddendocs.samtec.com/prints/ftsh-1xx-xx-xxx-dv-xxx-mkt.pdf, Datasheet Version="Rev. ET, 10/1995", Family=RectangularConnectors-Headers,MalePins, Manufacturer URL=http://www.samtec.com/, Mating Products="SFMC-105-L2-S-D-TR-ND / -CONN.05\"SURFACE10POSSMT / FLE-105-01-G-DV-TR-ND / -CONNSKT1.27MM10POSDUALSMD / FLE-105-01-G-DV-A-P-ND / -CONNSKT1.27MM10POSDUALSMD / FLE-105-01-G-DV-A-ND / -CONNSKT1.27MM10POSDUALSMD / CLP-105-02-G-D-P-TR-ND / -CONNRCPT10POSDUAL.05\"SMD / SAM1155-05-ND / -CONNRCPT10POSDUAL.05\"SMD / SAM1154-05-ND / -CONNRCPT10POSDUAL.05\"SMD / SAM1153-05-ND / -CONNRCPT10POSDUAL.05\"SMD / SAM1226-05-ND / -CONNRCPT.05\"10POSDUALSMD", Mounting Type=SurfaceMount, Number of Positions=10, Number of Positions Loaded=All, Number of Rows=2, Other Names=Q3937619, Package URL=http://suddendocs.samtec.com/prints/ftsh-1xx-xx-xxx-dv-xxx-footprint.pdf, Packaging=Tube, Pitch="0.050\"(1.27mm)", Product Training Modules=Board-to-BoardConnectors, Row Spacing="0.050\"(1.27mm)", Series=FTSH, Termination=Solder
P2: "Header, 3-Pin", LatestRevisionDate=17-Jul-2002, LatestRevisionNote="Re-released for DXP Platform.", Publisher="Altium Limited"
R1 R2 R3 R4 R5 R6 R7 R8 R9 R10 R11 R12 R13 R14 R15 R16 R17 R18 R19 R20 R21 R22 R23 R24 R25 R26 R27 R28 R29 R30 R31 R32: "Resistor", LatestRevisionDate=17-Jul-2002, LatestRevisionNote="Re-released for DXP Platform.", PackageDescription="Axial Device, Thru-Hole; 2 Leads; 0.3 in Pin Spacing", PackageReference=AXIAL-0.3, Published=8-Jun-2000, Publisher="Altium Limited"
U1: library part CMP-2100-03661-1, "Multiprotocol Bluetooth Smart, ANT/ANT+ and Proprietary System-on-Chip, 2.4 GHz, 256 KB FLASH, 1.7 to 3.6 V, -40 to 85 degC, 48-Pin QFN, RoHS, Tape and Reel", Frequency=2.4GHz, Manufacturer="Nordic Semiconductor", Max Operating Temperature=85degC, Min Operating Temperature=-40degC, Package Description="48-Pin Quad Flat No-lead Package, Body 6 x 6 mm, Pitch 0.4 mm, Thermal Pad 4.6 x 4.6 mm", Package Reference=QF-48, Datasheet URL=http://infocenter.nordicsemi.com/pdf/nRF52832_PS_v1.0.pdf, Datasheet Version="Rev. 1.0, 02/2016", Lead Free=LeadFree, Manufacturer URL=http://www.nordicsemi.com/eng/Products/, Max Frequency=2.4GHz, Mount=SurfaceMount, Packaging=TapeandReel, RoHSCompliant=true
U2: library part CMP-04948-000003-1, "LOW-POWER HIGH-ACCURACY ANALOG O", Ambient Temperature Range High=+150°C, Ambient Temperature Range Low=-40°C, Manufacturer="Texas Instruments", Manufacturer Part Number=TMP235A2DBZR, Max Supply Voltage=5.5V, Min Supply Voltage=2.3V, Operating Supply Current=9uA, Output Current=500uA, Package=DBZ0003A, Temperature="-40°C to +150°C", Accuracy=0.5%, Automotive=No, Category=IC, ComponentLink2Description=Datasheet, ComponentLink2URL=http://www.ti.com/lit/ds/symlink/tmp235.pdf, Device Class L1=Sensors, Device Class L2="Temperature and Humidity Sensors", Device Class L3=unset, Digikey Description="LOW-POWER HIGH-ACCURACY ANALOG O", Height=1.12mm, Lead Free=Yes, Max Junction Temp=+150°C, Mouser Description="±2°C Analog output temperature sensor, with 10mV /°C gain 3-SOT-23 -40 to 150", Octopart=https://octopart.com/tmp235a2dbzr-texas+instruments-94966376, RoHS=TRUE, Sensor Output="Analog Voltage", Standoff Height=0.01mm, Temperature Range High=+150°C, Temperature Range Low=-40°C
U3: library part CMP-12177-000008-1, "IMU ACCEL/GYRO I2C/SPI 14LGA", Manufacturer=STMicroelectronics, Max Supply Voltage=3.6V, Min Supply Voltage=1.62V, Operating Supply Current=0.29-0.65mA, Package=LGA-14L-DM00249496, Temperature="-40°C to +85°C", Temperature Range High=+85°C, Temperature Range Low=-40°C, Accel Range=2/4/8/16g, Automotive=No, Category=IC, ComponentLink2Description=Datasheet, ComponentLink2URL=https://www.st.com/resource/en/datasheet/lsm6dsm.pdf, Device Class L1=Sensors, Device Class L2="Motion Sensors", Device Class L3="Inertial Measurement Units (IMUs)", Digikey Description="IMU ACCEL/GYRO I2C/SPI 14LGA", Footprint Url=https://www.st.com/content/ccc/resource/technical/document/technical_note/73/17/9c/16/dd/96/4a/01/CD00134799.pdf/files/CD00134799.pdf/jcr:content/translations/en.CD00134799.pdf, Gyro Range=125/250/500/1000/2000°/s, Height=0.86mm, Lead Free=Yes, Manufacturer Part Number=LSM6DSMTR, Mouser Description="LSM6DSM Series 3.6 V I2C/SPI 3D Accelerometer and 3D Gyroscope - LGA-14", Octopart=https://octopart.com/lsm6dsmtr-stmicroelectronics-66358194, Resolution=16bits, RoHS=TRUE, Sensor Output=I2C,SPI, Sensor Type=Temperature,Accelerometer,Gyroscope
U4: library part CMP-0069-01211-3, "750mA Load Step-Down DC-DC Regulator, 6-pin Tiny SOT23, Pb-Free", Manufacturer="Texas Instruments", PackageTopMarking=SHAB*XTT, PowerWise=N, Code_IPC=SOT26A-6, Code_JEDEC=MO-193-AA, ComponentLink1Description="Datasheet URL", ComponentLink1URL=http://www.ti.com/general/docs/lit/getliterature.tsp?genericPartNumber=LM2736&fileType=pdf, CompType=Switcher, PackageDescription="Molded TSOT, 2.97 x 1.65 x 0.87mm Body, 6 Lead, 0.95mm Pitch", PackageReference=DDC0006A, PinCount=6, RoHS=Y
U5: library part Component_1
U7: library part CMP-12756-000033-1, "IC REG LINEAR 5V 150MA SOT23-5", Case/Package=SOT-23-5, Dropout Voltage=360mV, Max Input Voltage=24V, Max Operating Temperature=85°C, Max Output Current=250mA, Min Input Voltage=2.3V, Min Operating Temperature=-40°C, Operating Supply Current=50uA, Output Current=150mA, Output Voltage=5V, Package Quantity=3000, Power Supply Rejection Ratio (PSRR)=60dB, Reference Voltage=1.265V, Height=1.3mm, Lead Free="Lead Free", Length=3.02mm, Mount="Surface Mount", Number of Outputs=1, Number of Pins=5, Number of Regulators=1, Output Type=Fixed, Packaging="Tape and Reel", Polarity=Positive, Quiescent Current=50uA, Weight=0.001058oz, Width=1.7mm
U8: "Current Sensor 5A 1 Channel Hall Effect, Open Loop Unidirectional 12-PowerWQFN", Package="WFQFN-12 Allegro MicroSystems LLC", Digi-Key_Part_Number=620-1888-1-ND, Digi-Key_Purchase_URL=https://www.digikey.com/product-detail/en/allegro-microsystems/ACS70331EESATR-005U3/620-1888-1-ND/8120688?utm_source=snapeda&utm_medium=aggregator&utm_campaign=symbol, MF="Allegro MicroSystems LLC", MP=ACS70331EESATR-005U3, SnapEDA_Link=https://www.snapeda.com/parts/ACS70331EESATR-005U3/Allegro%20MicroSystems%20LLC/view-part/2732756/?ref=snap
U9: library part CMP-1685-00019-1, "Stepper Motor Controller IC, 8.2 to 45 V, -40 to 85 degC, 28-Pin HTSSOP (PWP), Green (RoHS & no Sb/Br), Tube", Capacitance="47 uF", Case\Package=Radial, Max Operating Temperature="85 degC", Min Operating Temperature="-40 degC", Package Quantity=200, Tolerance=20%, Voltage Rating="100 V", ComponentLink1Description="Manufacturer URL", ComponentLink1URL=http://www.ti.com/, ComponentLink2Description=Datasheet, ComponentLink2URL=http://www.ti.com/general/docs/lit/getliterature.tsp?genericPartNumber=DRV8825&fileType=pdf, DatasheetVersion="SLVSA73F, 07/2014", Diameter="8 mm", Height="11.5 mm", Lead Pitch="3.5 mm", Length="11.5 mm", Mount="Through Hole", PackageDescription="28-Pin Small Outline Package Integrated Circuit, Body 9.7 x 4.4 mm, Pitch 0.65 mm", PackageReference=PWP0028C, Packaging=Bulk, Pins=2, Radiation Hardening=No, REACH SVHC="No SVHC", RoHSCompliant=true, Voltage Rating (DC)="100 V", Width="8 mm"
X1: library part XTAL, "32.768kHz Crystal Oscillator", Supplier Part Number 1=FC-13532.7680KA-AC-ND, LatestRevisionDate=17-Jul-2002, LatestRevisionNote="Re-released for DXP Platform.", PackageDescription="Crystal, Thru-Hole; 2 Leads; Body 3.1 x 8.2 mm (Dia.xH)", PackageReference=R38, Published=8-Jun-2000, Publisher="Altium Limited", Supplier 1=Digi-Key
X2: "32MHz Crystal Oscillator", Supplier Part Number 1=490-17328-1-ND, Supplier 1=Digi-Key
X3: library part B2P-VH(LF)(SN), "Connector Header Through Hole 2 position 0.156 _3.96mm_", Package=None, Availability=Unavailable, MF="JST Sales", MP=B2P-VH_LF__SN_, Price=None, SnapEDA_Link=https://www.snapeda.com/parts/B2P-VH%28LF%29%28SN%29/JST%20Sales%20America%20Inc./view-part/104373/?ref=snap
D1 D4 D5: LatestRevisionDate=08-Jul-2005, LatestRevisionNote="Mech Layer 1 removed.", PackageDescription="LED; 2 Leads", PackageReference=LED-0, Published=8-Jun-2000, Publisher="Altium Limited"
L1 L2 L3 L4: Code_IEC=1005, Code_JEITA=0402, LatestRevisionDate=29-May-2009, LatestRevisionNote="IPC-7351 Footprint Added.", PackageDescription="Chip Inductor", PackageReference=0402-A, Published=8-Jun-2000, Publisher="Altium Limited"

## Free pads (board coordinates)
  round 112 hole 112 unplated: 6(250,250) 6(250,2000) 6(2000,250) 6(2000,2000)

## Via types
v1: diameter 18, hole 8, Top Layer to Bottom Layer, tented both sides, 97 vias
v2: diameter 30, hole 15, Top Layer to Bottom Layer, tented both sides, 33 vias
v3: diameter 19.68, hole 7.87, Top Layer to Bottom Layer, tented both sides, 31 vias
v4: diameter 50, hole 28, Top Layer to Bottom Layer, tented both sides, 5 vias
v5: diameter 18, hole 10, Top Layer to Bottom Layer, tented both sides, 2 vias

## Nets (pads, with @x,y where several pads share a name; then routed paths per layer and width w, separated by ;. In a path a pad name is that pad's centre, name@x,y a point inside that pad or via, vN(x,y) a via of type N, cw(c..) or ccw(c..) an arc to the next point about the centre after c; other vN are vias at no path point)
3V3: C10.1 C15.1 C16.1 C18.1 C19.2 C20.2 C24.1 C36.1 P1.1 R12.1 U1.13 U1.36 U1.48 U2.1 U3.5 U3.8 U5.7 U5.8 U5.9 U5.10 U8.12 | length 1504.4
  Top Layer w5: v1(743.57,1065.89) R12.1@782.95,1065.89 ; C36.1@1055.55,996.91 C36.1@1058.82,993.65 ; v1@1107.16,996.91 v1@1109.12,998.88 ; U5.10@1286.69,853.49 1286.69,865.51 1288.91,867.72 1289.93,867.72 1296.41,874.2 1301.73,874.2 1302.3,874.76 1302.44,874.76 ; U5.9@1302.44,853.49 1302.44,874.76 ; U5.8@1318.19,853.49 1318.19,890.51 ; v1(1320.97,923.02) 1305.17,938.81 1305.17,943.8 1331.32,969.95 C24.1@1331.32,971.91 1333.94,969.3 1333.94,906.26 ; U5.7@1333.94,853.49 1333.94,906.26 ; 1302.44,874.76 1318.19,890.51 ; 1318.19,890.51 1333.94,906.26
  Top Layer w10: P1.1@674.88,2010 v1(746.17,2010) ; C36.1@1055.55,996.91 v1@1107.16,996.91 ; C36.1@1058.82,993.65 1058.82,965.67 1075.24,949.26 U8.12@1075.24,938.43
  Bottom Layer w5: C19.2@1109.12,1188.55 1141.71,1188.55 1162.87,1167.39 U3.8@1184.66,1167.39 ; v1(1111.09,995.04) 1139.29,995.04 1215.22,1070.97 1217.18,1070.97 1230.43,1084.22 C20.2@1230.43,1086.19 1230.43,1119.14 1250.12,1138.82 U3.5@1250.12,1160.99 ; v1(1191.58,1364.06) 1150.13,1364.06 C10.1@1147.99,1361.91 1147.99,1364.06 1147.99,1395.46 1167.68,1415.14 U1.13@1226.02,1415.14 ; U1.36@1428.78,1617.9 1428.78,1628.83 1430.11,1630.16 1447.6,1630.16 v1(1470.12,1652.68) 1472.61,1655.17 1477.54,1655.17 1507.16,1684.79 C15.1@1507.16,1686.76 ; U2.1@1469.58,759.07 1472.2,761.69 1499.75,761.69 v1@1513.87,747.56 ; C18.1@1489.33,695 1494.61,700.28 1494.61,728.3 v1@1513.87,747.56 ; v1(1515,745) 1515.72,745.72 v1@1513.87,747.56
  Bottom Layer w10: v5(1107.16,1233.57) 1107.16,1190.52 C19.2@1109.12,1188.55 ; C20.2@1230.43,1086.19 1237.65,1093.41 v5(1276.85,1093.41) ; U1.48@1461.5,1411.95 1461.5,1401.8 1485.77,1377.52 v1(1486.24,1377.52) 1486.24,1377.05 1548.54,1314.75 C16.1@1548.54,1312.78
5V0: C33.2 J1.1 J2.1 J4.1 R11.2 U7.5 | length 1542.9
  Top Layer w10: J4.1@1805,1878.21 1809.41,1873.8 1821.07,1873.8 1826.19,1868.69 1920.26,1868.69 2073.31,1715.63 2073.31,1299.87 ; J1.1@1810,1184.91 1816.69,1184.91 1938.07,1063.53 U7.5@1962.22,1063.53 ; R11.2@1950.56,918.13 1950.56,976.32 1976.15,1001.91 C33.2@1978.12,1001.91 1978.12,1059.59 1982.05,1063.53 1978.12,1063.53 1969.79,1063.53 1963.57,1063.53 1962.22,1064.88 1962.22,1067.67 1945.02,1084.86 1945.02,1250.21 1994.67,1299.87 2073.31,1299.87 ; J2.1@2140.98,1299.87 2073.31,1299.87
7V4: C21.2 C32.2 C34.1 F1.1 L6.1 R13.2 U4.5 U6.2 U6.3 U7.1 U7.3 | length 4149.8
  Top Layer w5: U6.3@373.5,489.47 373.5,534.87 393.19,515.18 U6.2@393.19,489.47
  Top Layer w10: 373.5,534.87 373.5,548.65 ; U4.5@1396.85,288.88 1397.83,287.9 1454.01,287.9 R13.2@1455,286.91 ; R13.2@1458.86,286.91 1458.86,286.54 1463.7,281.69 1630.07,281.69 C21.2@1636.66,275.1 ; U7.1@2073.31,1063.53 2143.93,1063.53 ; U7.3@2073.31,1138.33 2116.01,1138.33 2139.79,1114.56 2139.79,1067.67 2143.93,1063.53 ; v1(2201.29,578.76) 2201.29,958.55 2201.18,958.66 2201.18,1039.65 2189.85,1050.98 2156.48,1050.98 2143.93,1063.53
  Top Layer w20: C34.1@309.76,612.39 373.5,548.65 ; C21.2@1636.66,275.1 1638.63,275.1 1681.19,232.54 1681.19,122.93 1664.97,106.71 v4(1664.97,98.59)
  Top Layer w30: C34.1@308.03,621.01 C34.1@308.03,622.98
  Top Layer w40: v4(268.66,541.91) 270.57,543.83 283.77,543.83 308.03,568.08 C34.1@308.03,622.98 ; v4(469.78,124.83) 471.7,126.74 723.63,126.74 L6.1@740.01,143.12 ; L6.1@775,142.11 812.09,105.03 1655.83,105.03 1662.26,98.59 v4(1664.97,98.59)
  Bottom Layer w10: F1.1@1787.76,149.3 1837.05,100 2070,100 2201.29,231.29 v1(2201.29,578.76)
  Bottom Layer w40: v4(268.66,541.91) 268.66,435.91 469.78,234.79 v4(469.78,124.83) ; v4(1664.97,98.59) 1666.88,96.68 1723.33,96.68 1774.29,147.64 1786.1,147.64 F1.1@1787.76,149.3
12V0: C39.1 C40.1 C41.2 C44.2 R21.2 R26.1 U8.1 U8.2 U9.4 U9.11 | length 2380.1
  Top Layer w10: R21.2@265.71,810.11 R21.2@265.71,814.09 265.71,1022.69 324.93,1081.91 C40.1@336.15,1081.91 ; C39.1@395.9,1676.95 397.88,1678.94 397.88,1727.49 R26.1@401.93,1731.53
  Top Layer w15: C39.1@395.38,1660.43 395.38,1641.42 413.98,1622.82 U9.4@562.24,1622.82 ; C41.2@489.1,1406.41 497.35,1414.65 502.49,1414.65 530.91,1443.08 561.63,1443.08 U9.11@562.24,1443.69
  Top Layer w20: C40.1@336.15,1081.91 C40.1@364.43,1081.91 567.86,1081.91 756.62,893.15 U8.2@1016.18,893.15 U8.1@1016.18,908.9 ; C44.2@397.93,1406.41 C41.2@489.1,1406.41
  Top Layer w30: v4(309.34,1731.61) 313.17,1727.78 329.02,1727.78 387.14,1669.66 C39.1@387.14,1667.7 ; C40.1@364.43,1081.91 320.43,1125.91 320.43,1373.16 318.1,1375.49 v4(318.1,1381.17) 323.52,1381.17 348,1405.66 397.18,1405.66 C44.2@397.93,1406.41
  Bottom Layer w30: v4(309.34,1731.61) 309.34,1726.2 318.1,1717.44 v4(318.1,1381.17)